# EAGLE board ATtiny85_Handheld (EAGLE 9.6.2)
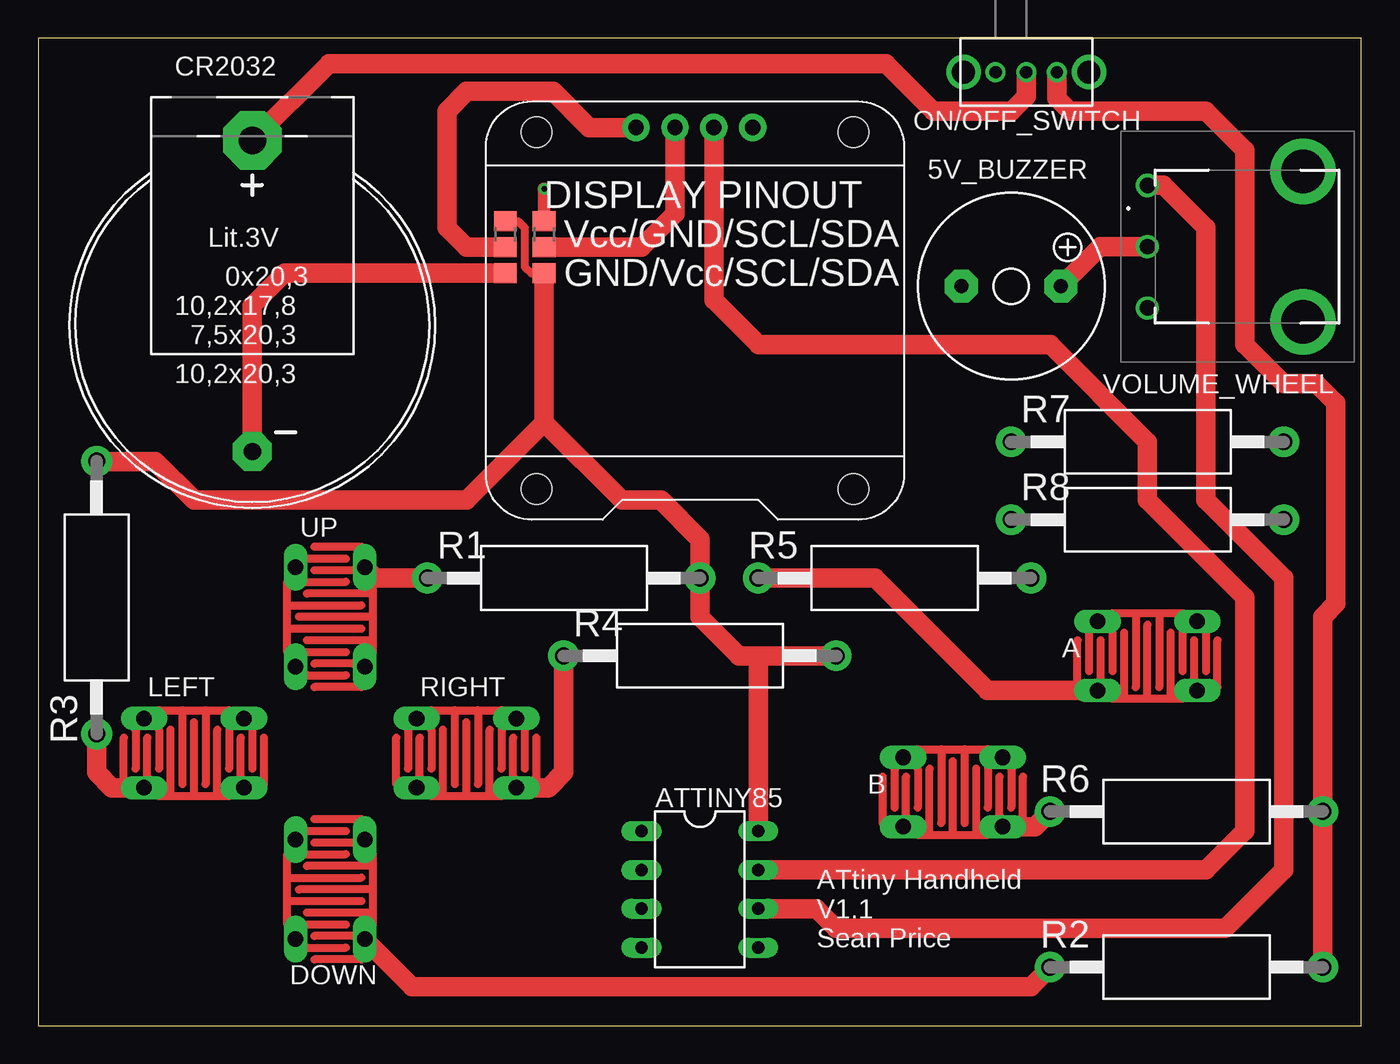
[diagram p0: board, top side]
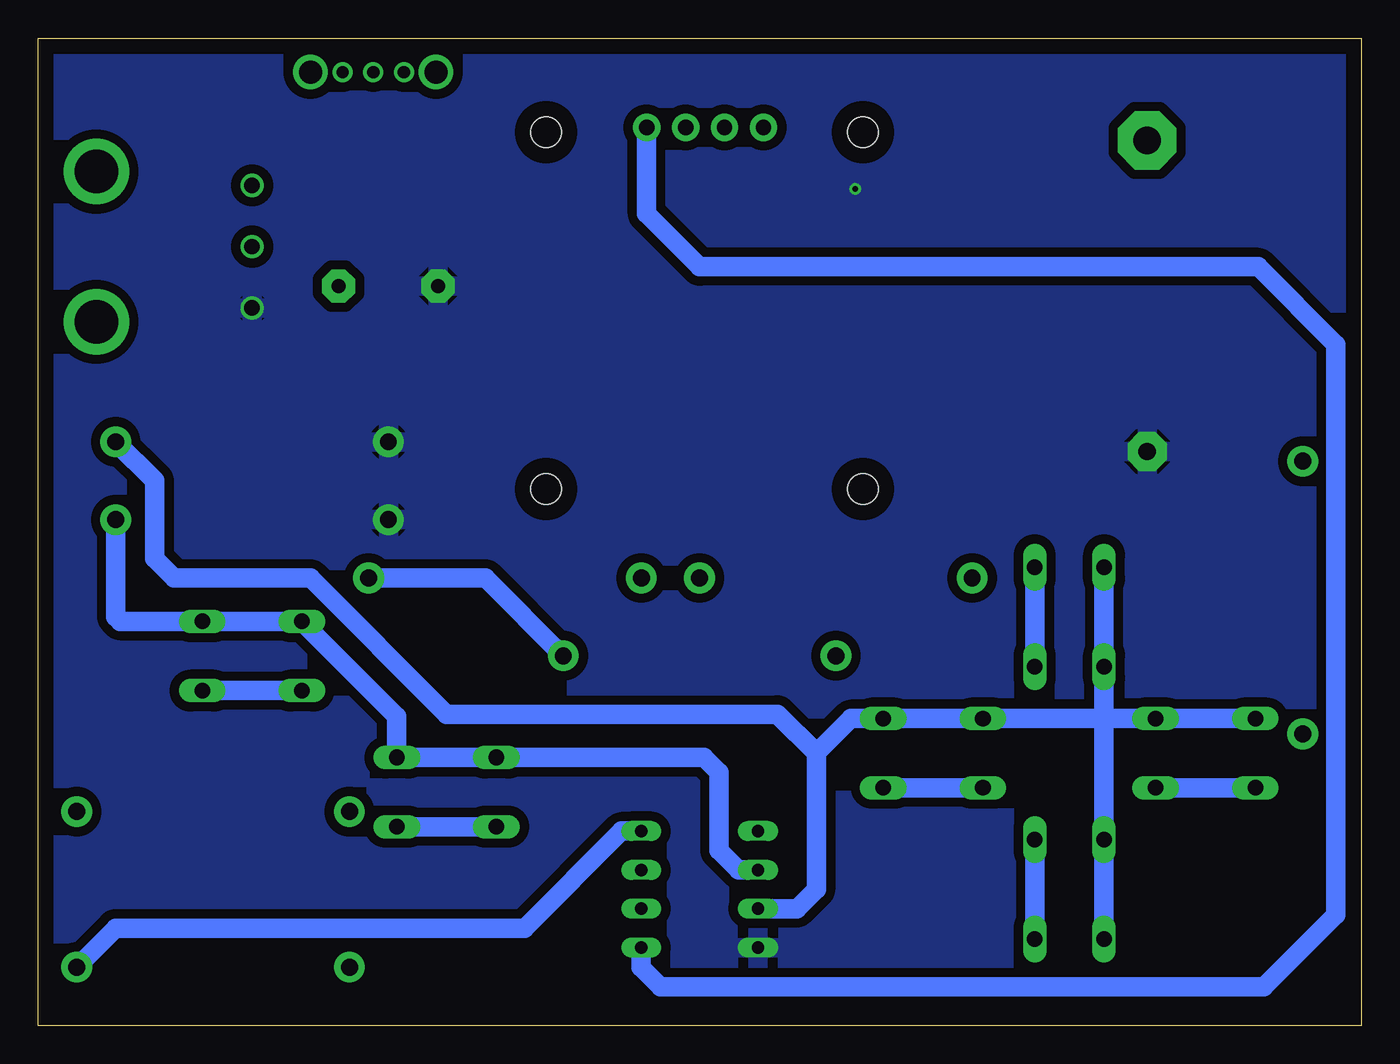
[diagram p1: board, bottom side, seen from below]

Size 86.34 x 64.44 mm. Coordinates in mm from the lower left corner, seen from the top.
Outline: 0,0 86.34,0 86.34,64.44 0,64.44 0,0
Copper layers (1*16): Top 0.035mm / dielectric 1.5mm / Bottom 0.035mm
Design rules "default": minimum track width 6mil, minimum drill 0.35mm, track to track 6mil, track to pad 6mil, pad to pad 6mil, via to via 6mil, smd to smd 6mil, copper to edge 40mil, drill to drill 6mil, minimum pad ring 10mil, minimum via ring 8mil, stop-mask expansion 4mil, vias tented up to drill 0mil, thermal gap 10mil

## Footprints (pad centres in the part's own frame; a part is rotated, then mirrored left to right if it is on the bottom)
F/QMX = drill 0.914 pad 2.159 octagon: + 3.251,0; - -3.251,0
TACTILE/SILICONE_BUTTON = drill 1.016 long: 1 -3.251,2.261; 2 3.251,2.261; 3 -3.251,-2.261; 4 3.251,-2.261
DIL08 = drill 0.813 long: 1 -3.81,-3.81; 2 -1.27,-3.81; 3 1.27,-3.81; 4 3.81,-3.81; 5 3.81,3.81; 6 1.27,3.81; 7 -1.27,3.81; 8 -3.81,3.81
CR2032_BATTERY_HOLDER = drill 1.803 pad 3.81 octagon: +@4 0,12.065 | drill 1.118 pad 2.54 octagon: -@1 0,-8.255
A0R-JMP = smd 1.5 x 1.3: 1 0,1.7; 2 0,0; 3 0,-1.7
OS102011MA1QN1 = drill 0.8: 1 -2,0; 2 0,0; 3 2,0 | drill 1.5: NC@1 -4.1,0; NC@2 4.1,0
AC01 = drill 1.1 pad 2: 1 -8.9,0; 2 8.9,0
OLED_0.96_I2C = drill 1 pad 1.778: GND -1.63,11.63; SCL 0.91,11.63; SDA 3.45,11.63; VCC -4.17,11.63 | hole 2: -10.67,-11.97; 10.03,-11.97; 10.03,11.33; -10.67,11.33
PTV09A4220FB103 = drill 1 pad 1.5: 1 -1.499,0; 2 2.5,0; 3 6.499,0 | drill 2.84 pad 4.26: MH1 -2.408,10.16; MH2 7.408,10.16

## Placement (x,y rotation side)
5V_BUZZER  F/QMX  [F/QMX]  63.5,48.26 0 top
A  TACTILE/SILICONE_BUTTON  [TACTILE/SILICONE_BUTTON]  72.39,24.13 0 top
ATTINY85  [DIL08]  43.18,8.89 270 top
B  TACTILE/SILICONE_BUTTON  [TACTILE/SILICONE_BUTTON]  59.69,15.24 0 top
CR2032  CR2032_BATTERY_HOLDER  [CR2032_BATTERY_HOLDER]  13.97,45.72 0 top
DOWN  TACTILE/SILICONE_BUTTON  [TACTILE/SILICONE_BUTTON]  19.05,8.89 90 top
JMP1  0R-JUMPA  [A0R-JMP]  30.48,50.8 0 top
JMP2  0R-JUMPA  [A0R-JMP]  33.02,50.8 0 top
LEFT  TACTILE/SILICONE_BUTTON  [TACTILE/SILICONE_BUTTON]  10.16,17.78 0 top
ON/OFF_SWITCH  OS102011MA1QN1  [OS102011MA1QN1]  64.48,62.23 180 top
R1  2.2k  [AC01]  34.29,29.21 0 top
R2  4.7k  [AC01]  74.93,3.81 0 top
R3  10k  [AC01]  3.81,27.94 90 top
R4  22k  [AC01]  43.18,24.13 0 top
R5  4.7k  [AC01]  55.88,29.21 0 top
R6  22k  [AC01]  74.93,13.97 0 top
R7  10k  [AC01]  72.39,38.1 0 top
R8  10k  [AC01]  72.39,33.02 0 top
RIGHT  TACTILE/SILICONE_BUTTON  [TACTILE/SILICONE_BUTTON]  27.94,17.78 0 top
U$1  OLED_0.96_I2C  [OLED_0.96_I2C]  43.18,46.99 0 top
UP  TACTILE/SILICONE_BUTTON  [TACTILE/SILICONE_BUTTON]  19.05,26.67 90 top
VOLUME_WHEEL  PTV09A-4220F-B103  [PTV09A4220FB103]  72.39,53.34 270 top

## Library data of the parts
5V_BUZZER = buzzer; OC_FARNELL: unknown; OC_NEWARK: unknown
A B DOWN LEFT RIGHT UP = Tactile_&_SIlicone_Button
ATTINY85 = ic-package
CR2032 = CR2032_Battery_Holder
JMP1 JMP2 = jump-0r-smd
ON/OFF_SWITCH = OS102011MA1QN1; AVAILABILITY: In Stock; DESCRIPTION: Slide Switch SPDT Through Hole, Right Angle; MF: C&K; MP: OS102011MA1QN1; PACKAGE: None; PRICE: None; PURCHASE-URL: https://pricing.snapeda.com/search/part/OS102011MA1QN1/?ref=eda
R1-R8 = resistor-power; OC_FARNELL: unknown; OC_NEWARK: unknown
U$1 = tft_1_8_1_44_oled_0_96
VOLUME_WHEEL = VolumeWheel; ARROW_PART_NUMBER: PTV09A-4220F-B103; ARROW_PRICE-STOCK: https://www.arrow.com/en/products/ptv09a-4220f-b103/bourns?region=nac; DESCRIPTION: Potentiometers 10K 20% 9MM CARBON POT; HEIGHT: 20.5mm; MANUFACTURER_NAME: Bourns; MANUFACTURER_PART_NUMBER: PTV09A-4220F-B103; MOUSER_PART_NUMBER: 652-PTV09A-4220FB103; MOUSER_PRICE-STOCK: https://www.mouser.co.uk/ProductDetail/Bourns/PTV09A-4220F-B103?qs=Qzws7J6gxqx7kQLhGnRMrg%3D%3D

## Nets
A2: ATTINY85.3 DOWN.1 DOWN.2 LEFT.1 LEFT.2 R7.2 RIGHT.1 RIGHT.2 UP.1 UP.2
A3: A.1 A.2 ATTINY85.2 B.1 B.2 R8.2
DISP_1: JMP1.2 U$1.VCC
DISP_2: JMP2.2 U$1.GND
GND: 5V_BUZZER.- ATTINY85.4 CR2032.-@1 JMP1.3 JMP2.1 R7.1 R8.1 VOLUME_WHEEL.3
N$1: CR2032.+@4 ON/OFF_SWITCH.2
N$3: R4.1 RIGHT.3 RIGHT.4
N$4: LEFT.3 LEFT.4 R3.1
N$5: DOWN.3 DOWN.4 R2.1
N$6: R1.1 UP.3 UP.4
N$8: A.3 A.4 R5.1
N$9: B.3 B.4 R6.1
N$14: 5V_BUZZER.+ VOLUME_WHEEL.2
PWM: ATTINY85.6 VOLUME_WHEEL.1
SCL: ATTINY85.7 U$1.SCL
SDA: ATTINY85.5 U$1.SDA
VCC: ATTINY85.8 JMP1.1 JMP2.3 ON/OFF_SWITCH.1 R1.2 R2.2 R3.2 R4.2 R5.2 R6.2

## Tracks (layer width: path | path; a pad name or v marks a point on that pad's centre or on a via)
A2
  Bottom 1.27: LEFT.1 LEFT.2 16.51,20.04 | 16.51,20.04 RIGHT.1 RIGHT.2 33.3,20.04 35.56,17.78 | UP.2 UP.1 16.79,20.32 16.51,20.04 | DOWN.1 DOWN.2 16.79,19.76 16.51,20.04 | 35.56,17.78 35.56,8.89 36.83,7.62 ATTINY85.3 | R7.2 78.74,35.56 78.74,30.48 77.47,29.21 68.58,29.21 59.69,20.32 38.1,20.32 35.56,17.78
A3
  Bottom 1.27: R8.2 81.28,26.67 81,26.39 A.2 A.1 62.94,20.19 B.2 B.1 42.9,17.5 41.91,16.51 41.91,11.43 40.64,10.16 ATTINY85.2
DISP_1
  Top 1.27: JMP1.2 27.94,50.8 26.67,52.07 26.67,59.69 27.95,60.97 33.61,60.97 35.96,58.62 U$1.VCC
DISP_2
  Top 1.27: JMP2.2 39.37,50.8 41.55,52.98 U$1.GND
GND  (via drill 0.35)
  Top 0.813: v33.02,54.61 JMP2.1
  Top 1.27: JMP1.3 16.08,49.1 13.97,46.99 CR2032.-@1
  pour Bottom (isolate 0.61): 0,64.77 86.36,64.77 86.36,0 0,0
N$1
  Top 1.27: ON/OFF_SWITCH.2 64.48,60.67 63.5,59.69 58.42,59.69 55.32,62.79 18.97,62.79 CR2032.+@4
N$3
  Top 1.27: RIGHT.4 33.3,15.52 34.29,16.51 R4.1
  Bottom 1.27: RIGHT.3 RIGHT.4
N$4
  Top 1.27: LEFT.3 4.8,15.52 3.81,16.51 R3.1
  Bottom 1.27: LEFT.3 LEFT.4
N$5
  Top 1.27: DOWN.3 24.41,2.54 64.77,2.54 R2.1
  Bottom 1.27: DOWN.4 DOWN.3
N$6
  Top 1.27: UP.4 22.02,29.21 R1.1
  Bottom 1.27: UP.4 UP.3
N$8
  Top 1.27: A.3 61.95,21.87 54.61,29.21 R5.1
  Bottom 1.27: A.4 A.3
N$9
  Top 1.27: B.4 65.04,12.98 R6.1
  Bottom 1.27: B.3 B.4
N$14
  Top 1.27: 5V_BUZZER.+ 69.33,50.84 VOLUME_WHEEL.2
PWM
  Top 1.27: VOLUME_WHEEL.1 73.43,54.84 76.2,52.07 76.2,34.29 81.28,29.21 81.28,10.16 77.47,6.35 52.07,6.35 50.8,7.62 ATTINY85.6
SCL
  Top 1.27: ATTINY85.7 76.2,10.16 78.74,12.7 78.74,27.94 72.39,34.29 72.39,38.1 66.04,44.45 46.99,44.45 44.09,47.35 U$1.SCL
SDA
  Bottom 1.27: ATTINY85.5 46.99,3.81 45.72,2.54 6.35,2.54 1.65,7.24 1.65,44.45 6.73,49.53 43.18,49.53 46.63,52.98 U$1.SDA
VCC
  Top 0.508: JMP1.1 31.32,52.5 31.75,52.07 31.75,49.53 32.18,49.1 JMP2.3
  Top 1.27: R2.2 R6.2 83.83,26.68 84.69,27.54 84.69,40.64 83.42,41.91 81.28,41.91 78.74,44.45 78.74,57.15 76.2,59.69 67.31,59.69 66.48,60.52 ON/OFF_SWITCH.1 | R3.2 7.62,36.83 10.16,34.29 27.94,34.29 33.02,39.37 | JMP2.3 33.02,39.37 | 33.02,39.37 38.1,34.29 40.64,34.29 43.19,31.74 R1.2 43.18,26.67 45.72,24.13 46.99,24.13 | 46.99,24.13 R4.2 | ATTINY85.8 46.99,24.13
  Bottom 1.27: R5.2 57.16,29.21 R4.2 | ATTINY85.8 48.26,12.7 54.61,6.35 81.29,6.35 R2.2

## Text on the board
tPlace: DISPLAY PINOUT | Vcc/GND/SCL/SDA | GND/Vcc/SCL/SDA
tNames: ATtiny Handheld / V1.1 / Sean Price